# EAGLE board acs758 (EAGLE 9.6.2)
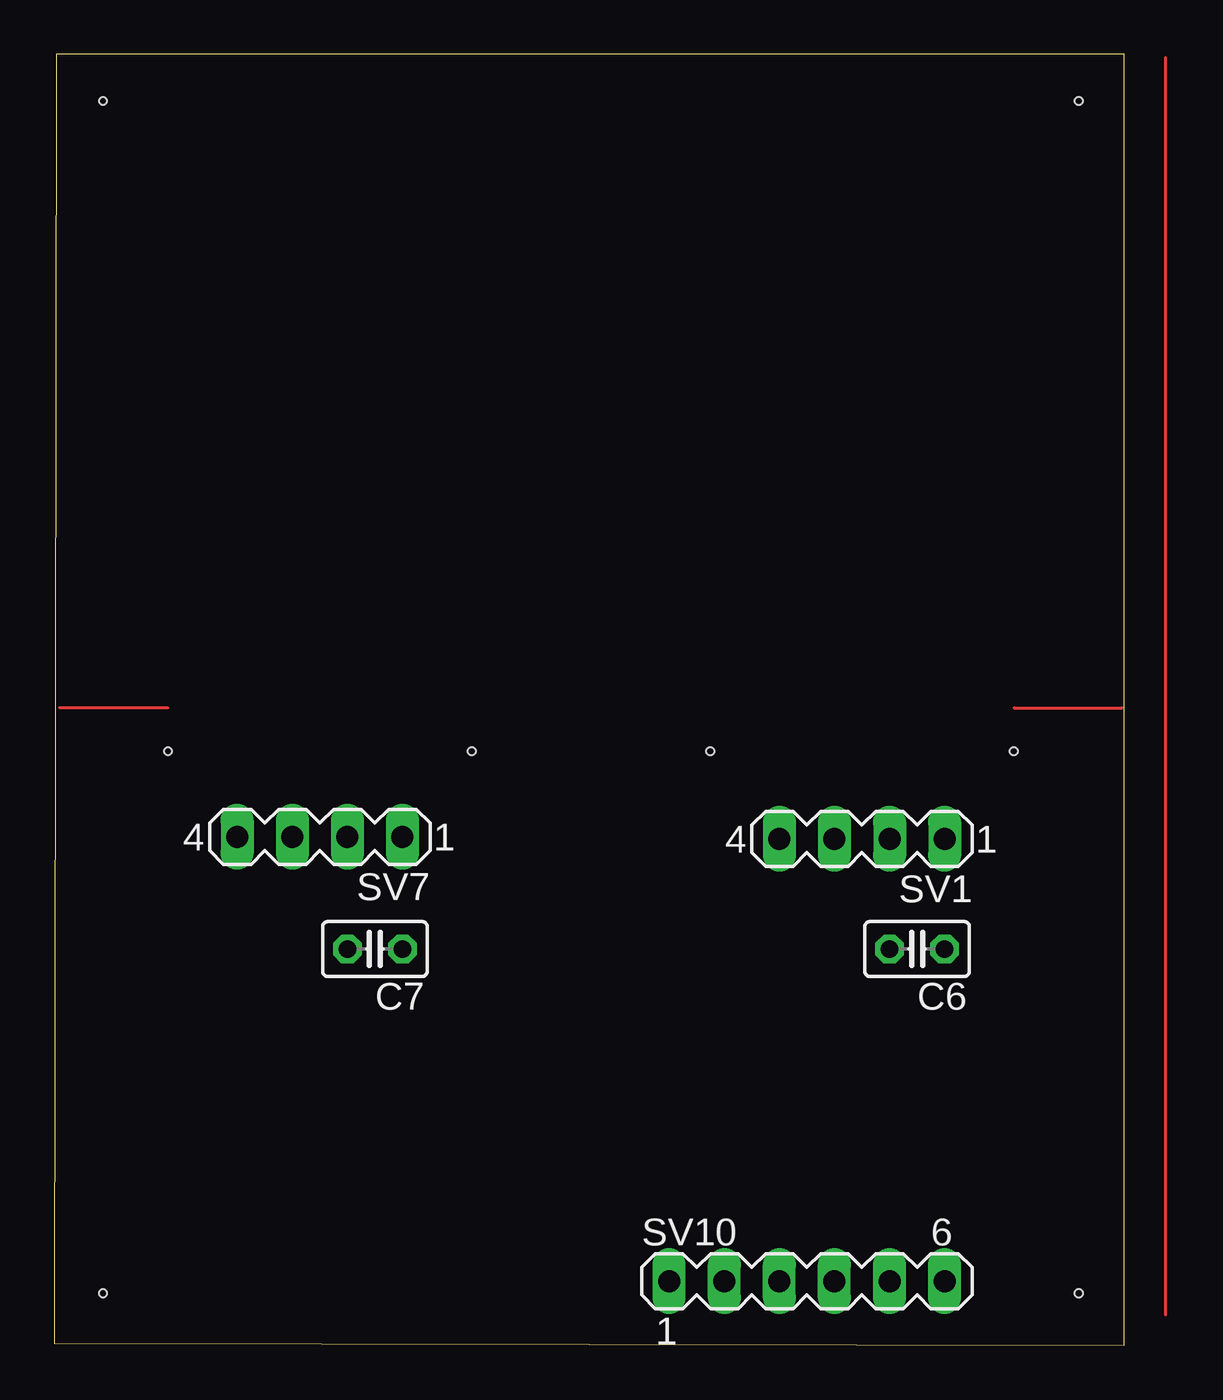
[diagram p0: board, top side]
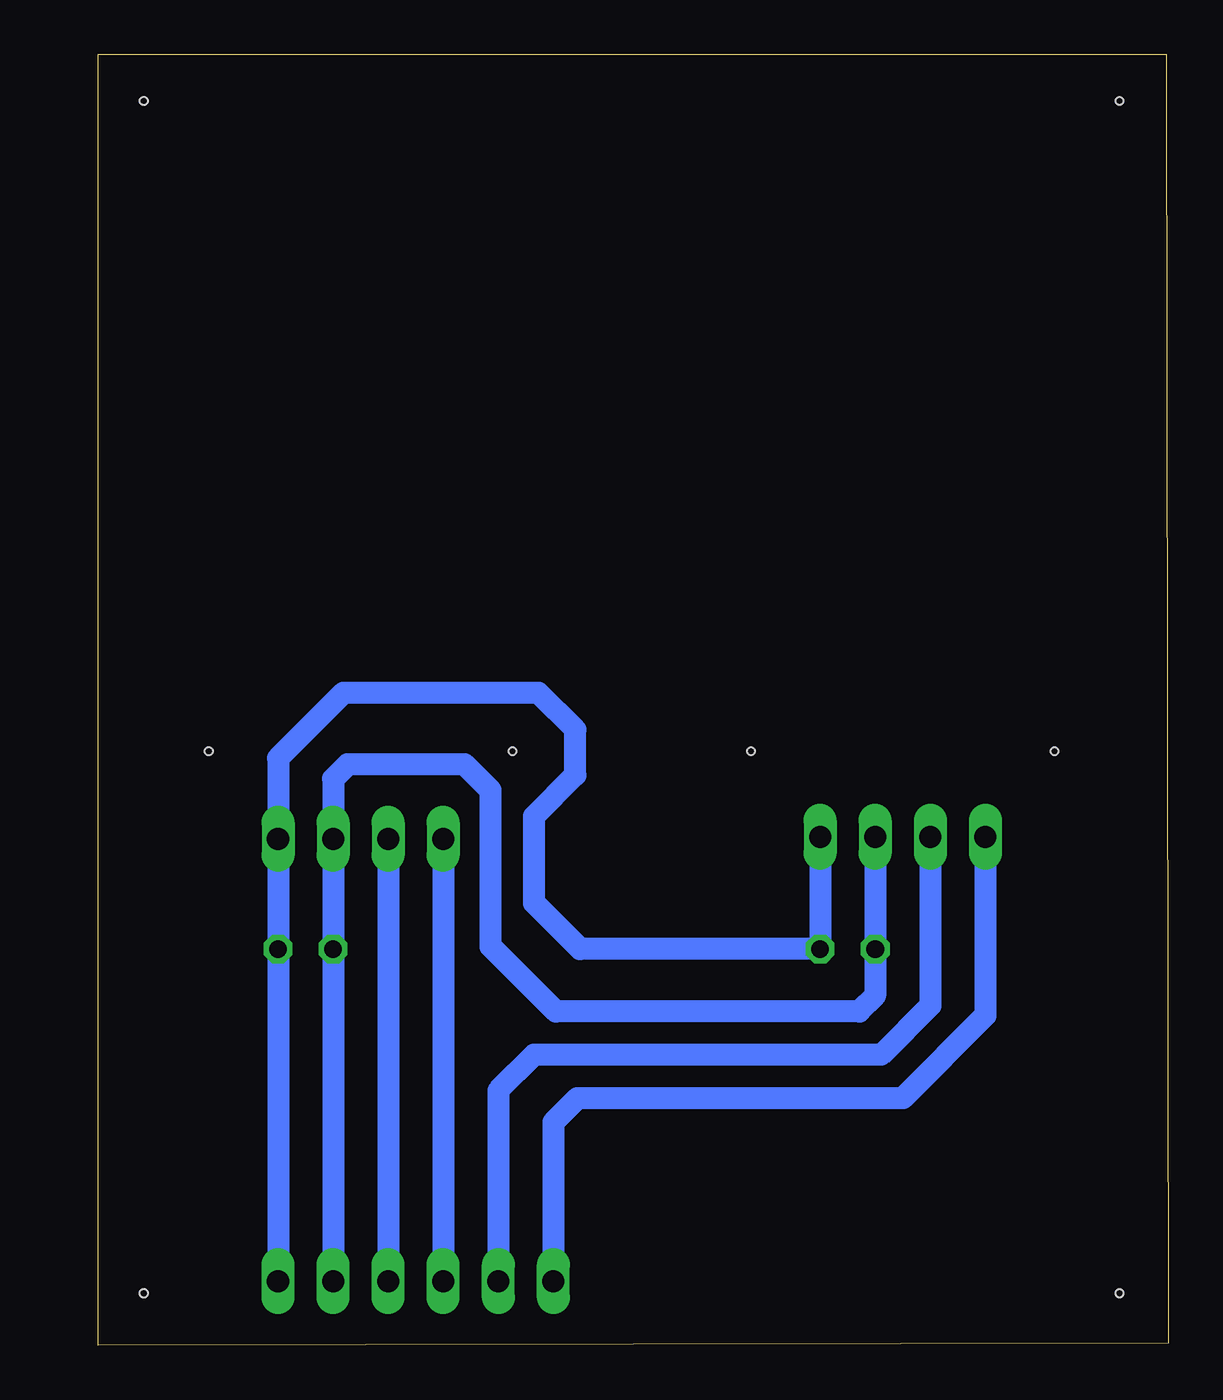
[diagram p1: board, bottom side, seen from below]

Size 49.35 x 59.56 mm. Coordinates in mm from the lower left corner, seen from the top.
Outline: 0,0.1 49.35,0 49.35,59.56 0.1,59.56 0,0.1
Copper layers (1*16): Top 0.035mm / dielectric 1.5mm / Bottom 0.035mm
Design rules "default": minimum track width 6mil, minimum drill 0.35mm, track to track 6mil, track to pad 6mil, pad to pad 6mil, via to via 6mil, smd to smd 6mil, copper to edge 40mil, drill to drill 6mil, minimum pad ring 10mil, minimum via ring 8mil, stop-mask expansion 4mil, vias tented up to drill 0mil, thermal gap 10mil
Holes 0.35 mm at 5.25,27.4 19.25,27.4 30.25,27.4 44.25,27.4 2.25,2.4 47.25,2.4 47.25,57.4 2.25,57.4

## Footprints (pad centres in the part's own frame; a part is rotated, then mirrored left to right if it is on the bottom)
C025-025X050 = drill 0.813 octagon: 1 -1.27,0; 2 1.27,0
MA04-1 = drill 1.016 long: 1 -3.81,0; 2 -1.27,0; 3 1.27,0; 4 3.81,0
MA06-1 = drill 1.016 long: 1 -6.35,0; 2 -3.81,0; 3 -1.27,0; 4 1.27,0; 5 3.81,0; 6 6.35,0

## Placement (x,y rotation side)
C2  [C025-025X050]  -70.23,-37.77 0 top  (outside the outline)
C3  [C025-025X050]  -76.58,-37.77 0 top  (outside the outline)
C4  [C025-025X050]  -54.99,-31.42 0 top  (outside the outline)
C5  [C025-025X050]  -61.34,-31.42 0 top  (outside the outline)
C6  [C025-025X050]  39.79,18.28 180 top
C7  [C025-025X050]  14.79,18.28 180 top
SV1  [MA04-1]  37.25,23.36 180 top
SV2  [MA04-1]  -60.07,-49.2 0 top  (outside the outline)
SV3  [MA04-1]  -74.04,-49.2 0 top  (outside the outline)
SV7  [MA04-1]  12.25,23.46 180 top
SV8  [MA04-1]  -74.04,-42.85 0 top  (outside the outline)
SV9  [MA04-1]  -60.07,-36.5 0 top  (outside the outline)
SV10  [MA06-1]  34.71,2.96 0 top
SV11  [MA06-1]  -61.34,-63.17 0 top  (outside the outline)
SV12  [MA06-1]  -61.34,-55.55 0 top  (outside the outline)

## Library data of the parts
C2-C7 = rcl; SPICEPREFIX: C
SV1-SV3 SV7-SV12 = con-lstb; OC_FARNELL: unknown; OC_NEWARK: unknown

## Nets
N$1: SV1.3 SV10.4
N$3: C4.1 C5.1 SV3.1 SV9.1 SV12.6
N$4: SV2.3 SV11.4
N$5: SV3.3 SV12.4
N$6: SV3.4 SV12.3
N$7: SV9.3 SV12.2
N$8: SV9.4 SV12.1
N$9: C2.1 C3.1 SV2.1 SV8.1 SV11.6
N$11: SV2.4 SV11.3
N$12: SV8.3 SV11.2
N$13: SV8.4 SV11.1
N$14: C6.1 C7.1 SV1.1 SV7.1 SV10.6
N$16: SV1.4 SV10.3
N$17: C6.2 C7.2 SV1.2 SV7.2 SV10.5
N$18: C2.2 C3.2 SV2.2 SV8.2 SV11.5
N$19: SV7.3 SV10.2
N$20: SV7.4 SV10.1
N$21: C4.2 C5.2 SV3.2 SV9.2 SV12.5

## Tracks (layer width: path | path; a pad name or v marks a point on that pad's centre or on a via)
N$1
  Bottom 1.016: SV1.3 SV10.4
N$3  (4 unrouted)
N$4  (1 unrouted)
N$5  (1 unrouted)
N$6  (1 unrouted)
N$7  (1 unrouted)
N$8  (1 unrouted)
N$9  (4 unrouted)
N$11  (1 unrouted)
N$12  (1 unrouted)
N$13  (1 unrouted)
N$14
  Bottom 1.016: SV7.1 C7.1 27.13,18.28 29.25,20.4 29.25,24.4 27.35,26.3 27.35,28.4 29.05,30.1 38.05,30.1 41.06,27.09 SV1.1 C6.1 SV10.6
N$16
  Bottom 1.016: SV1.4 SV10.3
N$17
  Bottom 1.016: SV7.2 C7.2 13.52,16.13 14.25,15.4 28.25,15.4 31.25,18.4 31.25,25.6 | SV10.5 C6.2 SV1.2 38.52,26.13 37.85,26.8 32.45,26.8 31.25,25.6 | 31.55,25.9 31.25,25.6
N$18  (4 unrouted)
N$19
  Bottom 1.016: SV7.3 10.98,15.67 13.25,13.4 29.25,13.4 30.9,11.75 SV10.2
N$20
  Bottom 1.016: SV7.4 8.44,15.21 12.25,11.4 27.25,11.4 28.36,10.29 SV10.1
N$21  (4 unrouted)
(copper drawn outside any net)
  shapes: Top area x3